# EAGLE board RGBI2Cv2 (EAGLE 6.2)
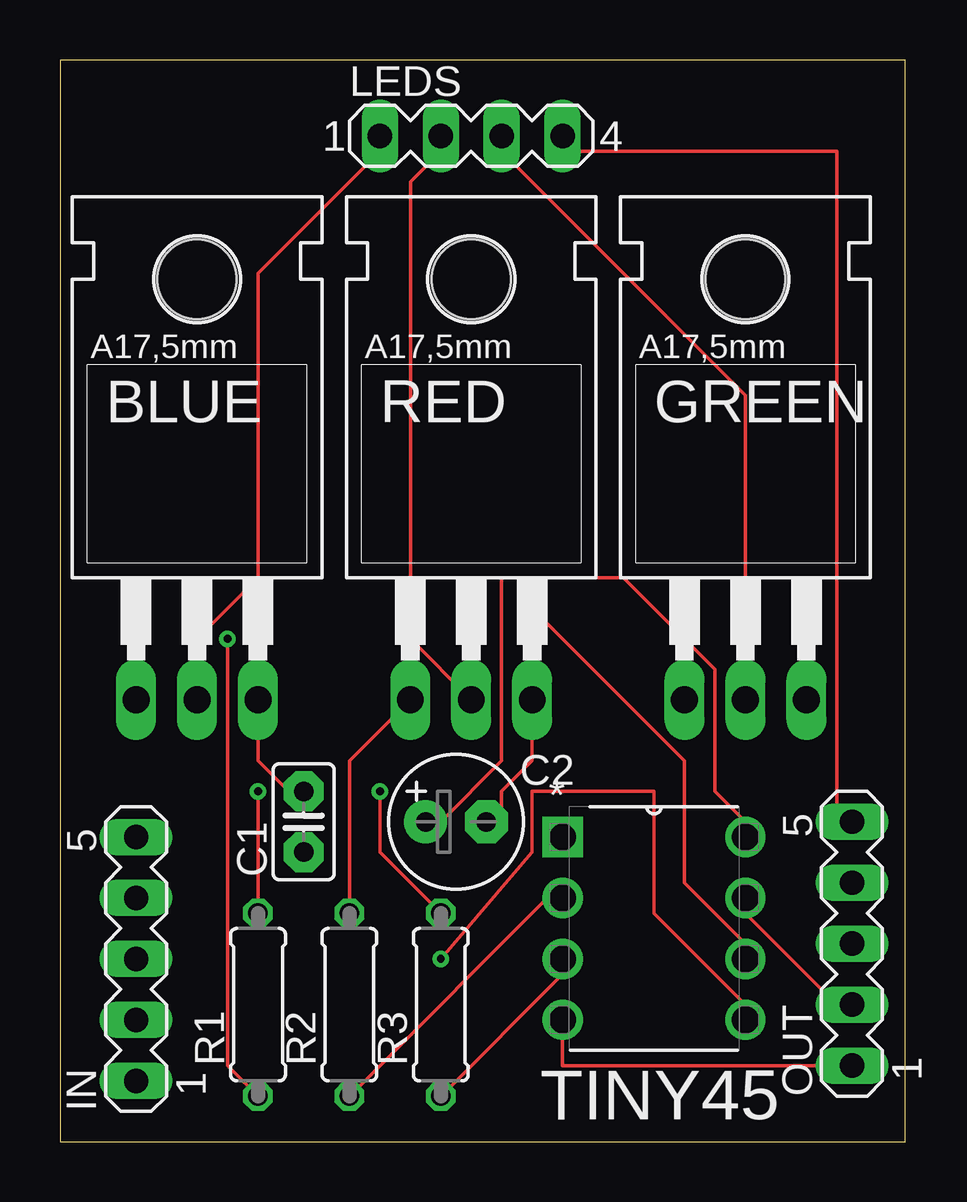
[diagram p0: board, top side]
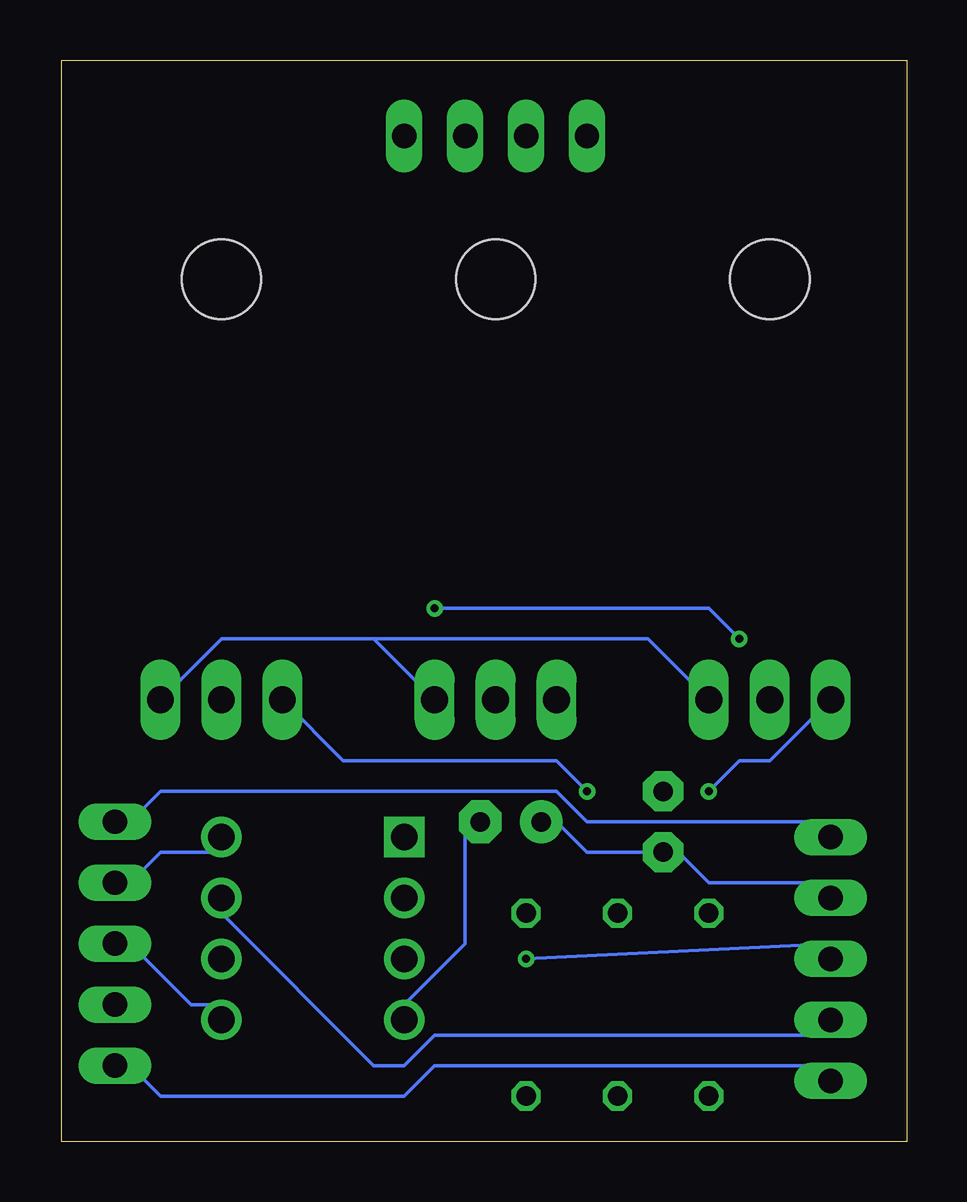
[diagram p1: board, bottom side, seen from below]

Size 35.23 x 45.08 mm. Coordinates in mm from the lower left corner, seen from the top.
Outline: 35.23,45.08 0,45.08 0,0 35.23,0 35.23,45.08
Copper layers (1*16): Top 0.0356mm / dielectric 1.5011mm / Bottom 0.0356mm
Design rules: minimum track width 6mil, minimum drill 13mil, track to track 8mil, track to pad 6mil, pad to pad 6mil, via to via 6mil, smd to smd 6mil, copper to edge 15mil, drill to drill 6mil, minimum pad ring 7mil, minimum via ring 7mil, stop-mask expansion 4mil, vias tented up to drill 0mil, thermal gap 10mil

## Footprints (pad centres in the part's own frame; a part is rotated, then mirrored left to right if it is on the bottom)
TO220BH = drill 1.118 long: D 0,-6.35; G -2.54,-6.35; S 2.54,-6.35 | hole 3.302: 0,11.176
C025-025X050 = drill 0.813 pad 1.676 octagon: 1 -1.27,0; 2 1.27,0
E2,5-6 = drill 0.813 pad 1.778: + -1.27,0 | drill 0.813 pad 1.778 octagon: - 1.27,0
MA05-1 = drill 1.016 long: 1 -5.08,0; 2 -2.54,0; 3 0,0; 4 2.54,0; 5 5.08,0
MA04-1 = drill 1.016 long: 1 -3.81,0; 2 -1.27,0; 3 1.27,0; 4 3.81,0
0207/7 = drill 0.813 octagon: 1 -3.81,0; 2 3.81,0
DIP254P762X533-8 = drill 1.118 square: 1 -7.62,7.62 | drill 1.118: 2 -7.62,5.08; 3 -7.62,2.54; 4 -7.62,0; 5 0,0; 6 0,2.54; 7 0,5.08; 8 0,7.62

## Placement (x,y rotation side)
BLUE  STP16NF06  [TO220BH]  5.71,24.77 0 top
C1  0.1uF  [C025-025X050]  10.16,13.34 90 top
C2  100/6VuF  [E2,5-6]  16.51,13.34 0 top
GREEN  STP16NF06  [TO220BH]  28.57,24.77 0 top
IN  [MA05-1]  3.17,7.62 90 top
LEDS  [MA04-1]  17.14,41.91 0 top
OUT  [MA05-1]  33.02,8.26 90 top
R1  10K  [0207/7]  8.26,5.72 90 top
R2  10K  [0207/7]  12.07,5.72 90 top
R3  10K  [0207/7]  15.88,5.72 90 top
RED  STP16NF06  [TO220BH]  17.14,24.77 0 top
TINY45  ATTINY45-20PU  [DIP254P762X533-8]  28.57,5.08 0 top

## Library data of the parts
BLUE GREEN RED = transistor-power
C1 C2 = minimidi
IN LEDS OUT = con-lstb; OC_FARNELL: unknown; OC_NEWARK: unknown
R1-R3 = rcl
TINY45 = Atmel_By_element14_Batch_1; MPN: ATTINY45-20PU; OC_FARNELL: 1288352; OC_NEWARK: 23M5072; PACKAGE: PDIP-8; SUPPLIER: Atmel

## Nets
12V: IN.5 LEDS.4 OUT.5
GND: BLUE.S C1.2 C2.- GREEN.S IN.1 OUT.1 RED.S TINY45.4
N$1: BLUE.D LEDS.1
N$2: LEDS.2 RED.D
N$3: IN.2 OUT.2 TINY45.7
N$4: IN.3 OUT.3 TINY45.5
N$5: R1.1 TINY45.6
N$6: BLUE.G R1.2
N$7: R2.2 RED.G
N$8: GREEN.G R3.2
N$9: R2.1 TINY45.2
N$10: R3.1 TINY45.3
N$11: GREEN.D LEDS.3
VCC5V: C1.1 C2.+ IN.4 OUT.4 TINY45.8

## Tracks (layer width: path | path; a pad name or v marks a point on that pad's centre or on a via)
12V
  Top 0.152: LEDS.4 20.95,41.28 32.38,41.28 32.38,13.34 OUT.5
  Bottom 0.152: IN.5 3.17,13.34 13.34,13.34 14.61,14.61 31.12,14.61 32.38,13.34 OUT.5
GND
  Top 0.152: BLUE.S 8.26,15.88 9.53,14.61 C1.2 | RED.S 19.68,15.88 18.41,14.61 18.41,13.34 C2.- | OUT.1 20.95,3.18 TINY45.4
  Bottom 0.152: IN.1 3.17,3.18 19.68,3.18 20.95,1.91 31.12,1.91 32.38,3.18 OUT.1 | TINY45.4 20.95,5.72 18.41,8.26 18.41,13.34 C2.- | GREEN.S 28.57,20.96 22.22,20.96 | RED.S 22.22,20.96 | BLUE.S 10.79,20.96 22.22,20.96
N$1
  Top 0.152: BLUE.D 5.71,20.96 8.26,23.5 8.26,36.2 13.34,41.28 LEDS.1
N$2
  Top 0.152: RED.D 14.61,20.96 14.61,40.01 15.88,41.28 LEDS.2
N$3
  Top 0.152: OUT.2 32.38,5.72 28.57,9.53 TINY45.7
  Bottom 0.152: IN.2 3.17,4.45 19.68,4.45 20.95,3.18 22.22,3.18 28.57,9.53 TINY45.7
N$4  (via drill 0.33)
  Top 0.152: v15.88,7.62 19.68,12.07 19.68,14.61 24.77,14.61 24.77,9.53 28.57,5.72 TINY45.5
  Bottom 0.152: v15.88,7.62 3.17,8.26 IN.3 | OUT.3 32.38,8.26 29.84,5.72 28.57,5.72 TINY45.5
N$5  (via drill 0.33)
  Top 0.152: R1.1 6.99,3.18 v6.99,20.96 | v19.68,22.23 26.04,15.88 26.04,10.8 28.57,8.26 TINY45.6
  Bottom 0.152: v6.99,20.96 8.26,22.23 v19.68,22.23
N$6  (via drill 0.33)
  Top 0.152: v8.26,14.61 R1.2
  Bottom 0.152: v8.26,14.61 6.99,15.88 5.71,15.88 BLUE.G
N$7
  Top 0.152: R2.2 12.07,15.88 RED.G
N$8  (via drill 0.33)
  Top 0.152: R3.2 13.34,12.07 v13.34,14.61
  Bottom 0.152: v13.34,14.61 14.61,15.88 23.49,15.88 GREEN.G
N$9
  Top 0.152: R2.1 20.95,10.8 TINY45.2
N$10
  Top 0.152: R3.1 20.95,6.98 TINY45.3
N$11
  Top 0.152: GREEN.D 28.57,31.12 18.41,41.28 LEDS.3
VCC5V
  Top 0.152: TINY45.8 28.57,13.34 27.3,14.61 27.3,19.69 23.49,23.5 18.41,23.5 18.41,15.88 15.88,13.34 C2.+
  Bottom 0.152: OUT.4 32.38,10.8 31.12,12.07 28.57,12.07 TINY45.8 | IN.4 3.17,10.8 8.26,10.8 9.53,12.07 C1.1 13.34,12.07 14.61,13.34 C2.+